# EAGLE board Spectacular Robo (EAGLE 9.7.0)

Size 186.98 x 115.11 mm. Coordinates in mm from the lower left corner, seen from the top.
Outline: 0,0 186.98,0 186.98,115.11 0,115.11 0,0
Copper layers (1*16): Top 0.035mm / dielectric 1.5mm / Bottom 0.035mm
Design rules "default": minimum track width 6mil, minimum drill 0.35mm, track to track 6mil, track to pad 6mil, pad to pad 6mil, via to via 6mil, smd to smd 6mil, copper to edge 40mil, drill to drill 6mil, minimum pad ring 10mil, minimum via ring 8mil, stop-mask expansion 4mil, vias tented up to drill 0mil, thermal gap 10mil

## Footprints (pad centres in the part's own frame; a part is rotated, then mirrored left to right if it is on the bottom)
BATTERY-GENERIC = drill 1.118 pad 3.15 octagon: + 2.54,0; - -2.54,0
RESAD1016W63L850D250B = drill 0.83 pad 1.43: 1 -5.08,0; 2 5.08,0

## Placement (x,y rotation side)
P1  BATTERYGENERIC  [BATTERY-GENERIC]  44.9,98.51 180 top
R1  56k  [RESAD1016W63L850D250B]  78.79,108.78 0 top
R2  10k  [RESAD1016W63L850D250B]  88.95,106.24 0 top
R3  330k  [RESAD1016W63L850D250B]  106.73,108.78 0 top
R4  1k  [RESAD1016W63L850D250B]  99.11,103.7 0 top
R5  1k  [RESAD1016W63L850D250B]  116.89,106.24 180 top
R6  1k  [RESAD1016W63L850D250B]  6.33,41.99 270 top
R7  1k  [RESAD1016W63L850D250B]  6.33,24.21 270 top
R8  1k  [RESAD1016W63L850D250B]  6.33,8.97 270 top
R9  1k  [RESAD1016W63L850D250B]  180.65,33.47 270 top
R10  1k  [RESAD1016W63L850D250B]  11.41,34.37 180 top
R11  1k  [RESAD1016W63L850D250B]  16.49,24.21 90 top

## Library data of the parts
P1 R1-R11 = Tinkercad

## Nets
P1+: P1.+ R1.1 R6.1
P1-: P1.- R4.2 R5.1 R8.2 R11.1
R1_2: R1.2 R2.1 R3.1
R2_2: R2.2 R4.1
R3_2: R3.2 R5.2
R6_2: R6.2 R7.1 R10.2
R8_1: R7.2 R8.1
R10_1: R10.1 R11.2

## Tracks (layer width: path | path; a pad name or v marks a point on that pad's centre or on a via)
P1+  (2 unrouted)
P1-  (4 unrouted)
R1_2  (2 unrouted)
R2_2  (1 unrouted)
R3_2  (1 unrouted)
R6_2  (2 unrouted)
R8_1  (1 unrouted)
R10_1  (1 unrouted)